# Altium PCB SM3320-BATT-EV.PcbDoc (part 2 of 2)
Units mm, origin at the board's own origin, x right, y up, seen from the top; angles counter-clockwise.
Board outline 119 x 66.5 mm, 2 copper layers (Top Layer, Bottom Layer), stack 1.662 mm thick; 115 components, 48 nets, 280 pads, 270 vias.
Unrouted connection lines stored in the file: 11.
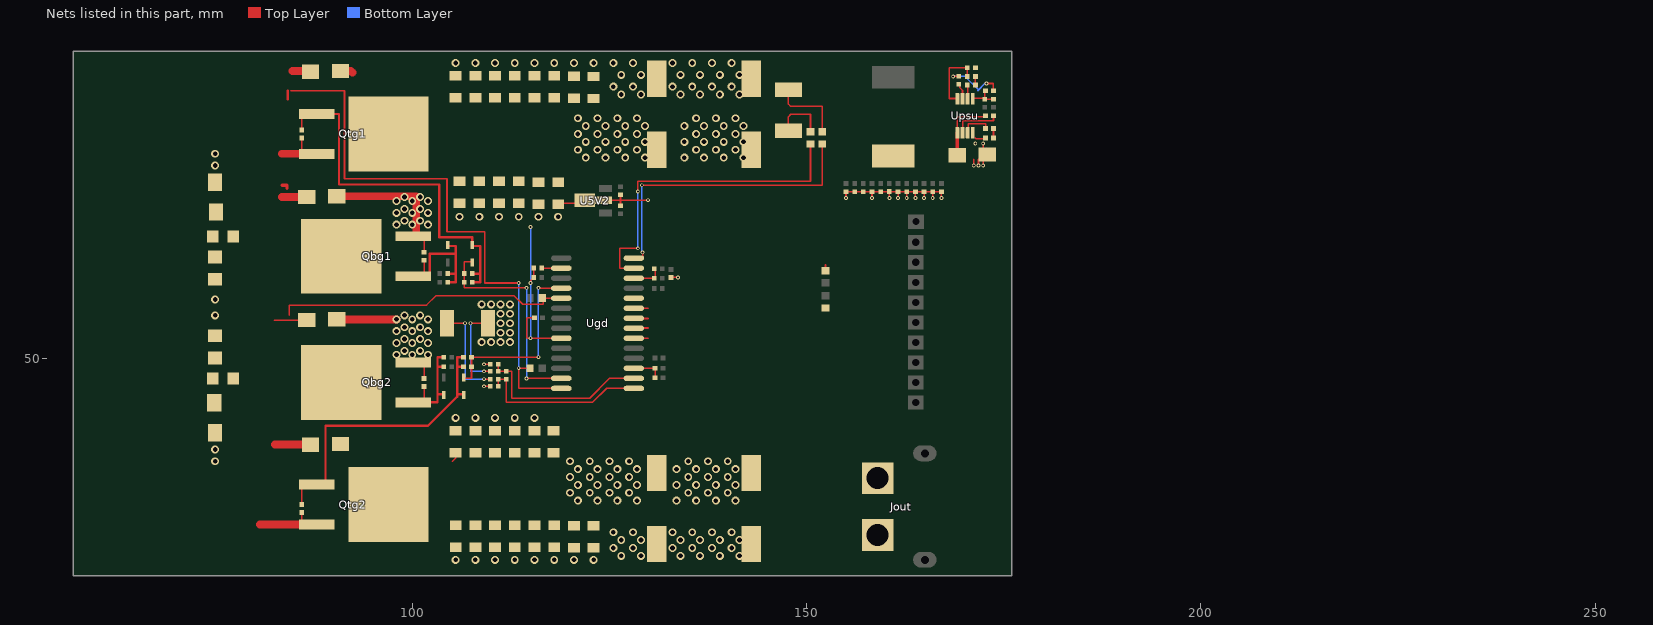
[diagram p2: the nets of this part, all layers, seen from the top]

## Via types
v1: diameter 1, hole 0.6, Top Layer to Bottom Layer, tented both sides, 220 vias
v2: diameter 0.48, hole 0.254, Top Layer to Bottom Layer, tented both sides, 50 vias

## Nets (pads, with @x,y where several pads share a name; then routed paths per layer and width w, separated by ;. In a path a pad name is that pad's centre, name@x,y a point inside that pad or via, vN(x,y) a via of type N, cw(c..) or ccw(c..) an arc to the next point about the centre after c; other vN are vias at no path point) (continued)
GND: C1.1 C4.1 C5.1 C5v1.1 C5v2.1 C6.1 C7.1 C8.1 C9.1 C10.1 C11.1 C12.1 C12v1.2 C12v2.2 C12v3.2 C12v4.2 C12v5.2 C12v6.2 C12v7.2 C12v8.2 C12v9.2 C12v10.2 C12v11.2 C12v12.2 C14.2 C15.2 C16.1 C20.1 C25.1 C27.1 C28.1 C30.1 C36.1 C41.1 C44.1 C45.1 C53.1 C54.1 C55.1 C58.1 C61.1 C70.1 C72.1 C130.1 C201.2 C410.1 C450.1 C470.1 C620.1 Cvcc.1 Cvdd.1 D14.1 D15.1 Dpsu1.2 Jout.MINUS R110.1 R140.1 Ragnd.1 Rcl2.1 Rcs.2 Rcsg.2 Rovs.2 Rpsufb2.1 Rvinb.1 U5V2.2 Ugd.23 Upsu.4 | length 82.3
  Top Layer w0.2: v2(107.4,54.5) 109.4,54.5 Rcs.2@109.4,54.4 ; v2(109.1,46.5) C15.2@109.892,46.5 ; v2(109.1,49.3) C14.2@109.892,49.3 ; C9.1@113.9,69.3 C9.1@114,69.4 ; v2(115,59.6) 115,59.9 Cvdd.1@115.4,60.3 ; Cvcc.1@115.292,55.2 114.5,55.2 114.5,52.6 v2(115,52.6) Ugd.23@118.6,52.6 ; Rovs.2@115.392,61.5 115.392,60.5 Cvdd.1@115.4,60.5 ; C30.1@116.4,69.3 C30.1@116.5,69.4 ; C58.1@118.5,69.605 118.5,69.7 U5V2.2@122.4,69.7 ; U5V2.2@124.7,69.9 124.9,70.1 126.4,70.1 ; C5v2.1@126.4,69.4 C5v2.1@126.4,69.408 126.4,70.1 ; C5v1.1@126.4,70.692 126.4,70.1 ; v2(129.9,70.1) 126.4,70.1 ; Ragnd.1@132.8,60.192 Ragnd.1@132.9,60.292 ; Ragnd.1@132.8,60.308 v2(133.7,60.3) ; v2(155,70.4) C12v1.2@155,71.192 C12v1.2@155,71.2 ; C12v1.2@155,71.292 C12v1.2@155,71.2 ; C12v1.2@155.008,71.192 C12v1.2@155,71.2 ; C12v1.2@155.2,71.2 155.2,71.192 C12v3.2@157,71.192 ; C12v2.2@156.1,71.192 C12v2.2@156.1,71.292 ; C12v3.2@157.2,71.292 C12v3.2@157.2,71.192 C12v4.2@158.2,71.192 ; v2(158.3,70.4) C12v4.2@158.3,71.192 C12v5.2@159.3,71.192 ; C12v5.2@159.4,71.192 C12v6.2@160.5,71.192 ; v2(160.5,70.4) C12v6.2@160.5,71.192 ; C12v6.2@160.5,71.2 C12v6.2@160.5,71.192 ; C12v7.2@161.4,71.192 C12v6.2@160.5,71.192 ; v2(161.6,70.4) C12v7.2@161.6,71.192 ; C12v7.2@161.6,71.2 C12v7.2@161.6,71.192 ; C12v8.2@162.6,71.192 C12v7.2@161.6,71.192 ; v2(162.7,70.4) C12v8.2@162.7,71.192 C12v8.2@162.7,71.199 ; C12v9.2@163.7,71.194 C12v8.2@162.758,71.199 ; C12v9.2@163.7,71.2 C12v8.2@162.5,71.2 ; v2(163.8,70.4) C12v9.2@163.8,71.199 ; C12v9.2@163.8,71.192 C12v10.2@164.9,71.192 ; v2(164.9,70.4) C12v10.2@164.9,71.192 ; v2(166,70.4) C12v11.2@166,71.192 ; C12v11.2@166,71.2 C12v11.2@166,71.192 ; v2(167.1,70.4) C12v12.2@167.1,71.192 ; C12v12.2@167.1,71.2 C12v12.2@167.1,71.192 ; C12v12.2@167.3,71.2 167.292,71.192 C12v12.2@167.1,71.192 ; v2(168.6,85.8) 169.292,85.8 C201.2@169.3,85.808 ; v2(171.2,74.5) 171.2,75.292 ; 171.4,78 171.508,77.892 172.392,77.892 Rcl2.1@172.4,77.9 ; v2(171.8,74.5) Dpsu1.2@171.8,75.292 ; v2(172.4,74.5) Dpsu1.2@172.4,75.292 ; Dpsu1.2@172.4,76.508 v2(172.4,77.3) ; Dpsu1.2@172.8,75.9 Dpsu1.2@172.8,76.7 ; v2(172.8,84.9) 173.693,84.9 173.693,84.6 Rpsufb2.1@173.699,84.008 ; Rpsufb2.1@173.5,83.9 Rpsufb2.1@173.608,83.901 ; C12v8.2@162.5,71.2 C12v8.2@162.7,71.199 ; C12v8.2@162.5,71.2 C12v8.2@162.7,71.199 ; C12v8.2@162.7,71.199 C12v8.2@162.758,71.199 ; C12v8.2@162.7,71.199 C12v8.2@162.758,71.199 ; C12v8.2@162.758,71.199 C12v9.2@163.8,71.199 ; C12v9.2@163.8,71.199 164.9,71.2 C12v10.2@164.9,71.192 ; C12v10.2@164.9,71.192 C12v11.2@166,71.192 ; C12v11.2@166,71.192 C12v12.2@167.1,71.192
  Bottom Layer w0.2: v2(107.4,54.5) 107.4,48.4 109.1,48.4 ; v2(115,52.6) v2(115,59.6) v2(115,66.7) ; v2(168.6,85.8) 170.1,85.8 171.7,84.2 ; 171.7,84 172.6,84.9 v2(172.8,84.9)
  other v1: 105.5,24.5 108,24.5 110.5,24.5 113,24.5 115.5,24.5 118,24.5 120.5,24.5 123,24.5 126.5,25 129,25 134,25 136.5,25 139,25 141.5,25 125.5,26 128,26 133,26 135.5,26 138,26 140.5,26 126.5,27 129,27 134,27 136.5,27 139,27 141.5,27 125.5,28 128,28 133,28 135.5,28 138,28 140.5,28 75,37 75,38.5 105.5,42.5 108,42.5 110.5,42.5 113,42.5 115.5,42.5 108.8,52.1 110,52.1 111.2,52.1 112.4,52.1 111.2,53.3 112.4,53.3 111.2,54.5 112.4,54.5 75,55.5 111.2,55.7 112.4,55.7 108.8,56.9 110,56.9 111.2,56.9 112.4,56.9 75,57.5 106,68 108.5,68 111,68 113.5,68 116,68 118.5,68 75,74.5 75,76 126.5,83.5 129,83.5 134,83.5 136.5,83.5 139,83.5 141.5,83.5 125.5,84.5 128,84.5 133,84.5 135.5,84.5 138,84.5 140.5,84.5 126.5,86 129,86 134,86 136.5,86 139,86 141.5,86 105.5,87.5 108,87.5 110.5,87.5 113,87.5 115.5,87.5 118,87.5 120.5,87.5 123,87.5 125.5,87.5 128,87.5 133,87.5 135.5,87.5 138,87.5 140.5,87.5
  other v2: 171.4,77.3
HIA: Ugd.7 | length 1.5
  Top Layer w0.2: Ugd.7@128.5,53.8 128.5,53.9 129.9,53.9
HIB: Ugd.8 | length 1
  Top Layer w0.2: Ugd.8@128.9,55.1 129.9,55.1
IIN: Ciin.2 Riin.2 Ugd.3 | length 3.5
  Top Layer w0.2: Ugd.3@128.2,48.785 128.2,48.8 Riin.2@130.592,48.8 ; Ciin.2@130.792,47.7 Riin.2@130.792,48.8 Riin.2@130.8,48.8
IOUT: Ciout.2 Riout.2 Ugd.12 | length 3
  Top Layer w0.2: Ugd.12@128.9,60.2 Riout.2@130.592,60.2 ; Riout.2@130.792,60.2 130.792,61.3 130.792,61.5 Ciout.2@130.8,61.5
LIA: Ugd.6 | length 1.8
  Top Layer w0.2: Ugd.6@128.1,52.595 128.1,52.6 129.9,52.6
LIB: Ugd.9 | length 1.2
  Top Layer w0.2: Ugd.9@128.8,56.3 128.8,56.4 129.9,56.4
NetC18_1: C18.1 D15.2 R110.2
NetC19_1: C19.1 D14.2 R140.2
NetC201_1: C201.1 Upsu.7 | length 1.9
  Top Layer w0.2: C201.1@169.5,84.9 169.4,84.8 169.45,84.35 169.775,84.025 Upsu.7@169.775,83.15
NetCbst_1: Cbst.1 Upsu.2 | length 5.7
  Top Layer w0.2: Upsu.2@169.8,79.3 169.8,80.2 173,80.2 ; 173.408,80.2 173,80.2 ; Cbst.1@173.6,80.7 173.7,80.6 173.7,80.2 173.508,80.2 173,80.2
NetCbst_2: Cbst.2 Dpsu1.1 L200.1 Upsu.1 | length 7.5
  Top Layer w0.2: Upsu.1@169.1,78.65 Upsu.1@169.125,78.65 ; Upsu.1@169.1,79.1 169.1,80.7 172.392,80.7
  Top Layer w0.4: Dpsu1.1@169.1,76.1 Upsu.1@169.1,78.65
NetCcmp_1: Ccmp.1 Rpsufb1.2 Rpsufb2.2 Upsu.5 | length 3.6
  Top Layer w0.2: Upsu.5@171.108,83.008 Rpsufb1.2@172.6,83.008 ; Rpsufb1.2@172.6,82.908 Rpsufb2.2@172.6,84 ; Rpsufb1.2@172.7,82.9 172.708,82.908 Ccmp.1@173.7,82.908
NetD3_2: D3.2 Qtg1.1 Rtg1a.2 Rtg1b.2 Rtg1s.2 | length 50.9
  Top Layer w0.2: Rtg1s.2@86,79.008 86,81 Qtg1.1@86.1,81
  Top Layer w0.3: Qtg1.1@87.856,81.04 90.7,81.04 90.7,72.1 103.4,72.1 103.4,65.4 107.6,65.4 D3.2@107.6,64.3 ; D3.2@107.6,64.4 D3.2@107.6,64.3 ; Rtg1a.2@107.608,59.7 108.6,59.7 ; Rtg1b.2@107.608,60.8 108.6,60.8 ; D3.2@107.6,64.3 108.6,64.3 ; 108.6,59.7 108.6,60.8 ; 108.6,59.7 108.6,60.8 ; 108.6,60.8 108.6,64.3 ; 108.6,60.8 108.6,64.3
NetD4_2: D4.2 Qtg2.1 Rtg2a.1 Rtg2b.1 Rtg2s.1 | length 35.6
  Top Layer w0.2: Rtg2s.1@86,31.508 Qtg2.1@86,33.5 ; Qtg2.1@88.5,33.7 Qtg2.1@88.6,33.7
  Top Layer w0.3: Qtg2.1@89,33.7 89,41.5 102,41.5 105.7,45.2 105.7,45.5 ; Rtg2b.1@106.492,49 105.7,49 ; Rtg2a.1@106.492,50.2 105.7,50.2 105.7,49 ; D4.2@106.5,45.7 106.3,45.5 105.7,45.5 ; 105.7,45.5 105.7,49
NetD5_2: D5.2 Qbg1.1 Rbg1a.2 Rbg1b.2 Rbg1s.2 | length 17.3
  Top Layer w0.2: Qbg1.1@101.5,61 Rbg1s.2@101.5,62.492
  Top Layer w0.3: Qbg1.1@100.144,60.46 Qbg1.1@102,60.46 ; Qbg1.1@102,60.2 102,60.4 Qbg1.1@102,60.46 ; Qbg1.1@102,60.5 Qbg1.1@102,60.46 ; Qbg1.1@102.2,60.46 102.2,63.3 105.5,63.3 ; D5.2@104.5,64.3 105.5,64.3 105.5,63.3 ; Rbg1b.2@104.508,60.8 105.5,60.8 ; Rbg1a.2@104.608,59.7 105.5,59.7 105.5,60.8 ; 105.5,60.8 105.5,63.3
NetD6_2: D6.2 Qbg2.1 Rbg2a.1 Rbg2b.1 Rbg2s.1 | length 15.4
  Top Layer w0.2: Qbg2.1@101.5,45 Rbg2s.1@101.5,46.492
  Top Layer w0.3: Qbg2.1@102,44.5 103.2,44.5 103.2,45.5 ; Rbg2a.1@103.9,50.2 103.2,50.2 ; Rbg2b.1@103.984,49 103.2,49 ; D6.2@104,45.5 103.5,45.5 103.2,45.5 ; 103.2,45.5 103.2,49 ; 103.2,45.5 103.2,49 ; 103.2,49 103.2,50.2 ; 103.2,49 103.2,50.2
NetRcl1_1: Rcl1.1 Rcl2.2 | length 1.2
  Top Layer w0.2: Rcl2.2@173.708,78 Rcl1.1@173.708,79.2
NetRcl1_2: Rcl1.2 Upsu.3 | length 3.7
  Top Layer w0.2: Upsu.3@170.5,79 170.5,79.8 172.7,79.8 172.7,79.4 Rcl1.2@172.5,79.2
NetRon_1: Ron.1 Ron_c.2 | length 1.3
  Top Layer w0.2: Ron_c.2@171.308,85.8 Ron_c.2@171.408,85.8 ; Ron.1@171.4,84.8 Ron.1@171.408,84.792 ; Ron.1@171.4,84.808 Ron_c.2@171.4,85.9 ; Ron.1@171.408,84.8 Ron.1@171.508,84.9
NetRon_2: Ron.2 Upsu.6 | length 1.9
  Top Layer w0.2: Ron.2@170.225,84.625 Ron.2@170.4,84.8 ; Upsu.6@170.425,83.05 Ron.2@170.425,84.725
NetRon_c_1: Ron_c.1 Rpsu1.1 Upsu.8 | length 8.6
  Top Layer w0.2: Upsu.8@169.1,83 168.1,83 168.1,86.9 Rpsu1.1@170.392,86.9 170.397,86.9 170.4,86.9 Rpsu1.1@170.4,86.8 ; Ron_c.1@170.384,85.6 170.386,85.8 Rpsu1.1@170.397,86.899
nRST: Ugd.10
OVS: Rovs.1 Ugd.16 | length 2.2
  Top Layer w0.2: Rovs.1@116.208,61.5 Ugd.16@118.3,61.5 ; Rovs.1@116.408,61.5 Rovs.1@116.408,61.6
PGND: Dbg1.2 Dbg2.2 Qbg1.3 Qbg2.3 Rbg1s.1 Rbg2s.2 Rcs.1 Rcsp.2 | length 38.4
  Top Layer w0.2: Qbg2.3@101.4,49.4 Qbg2.3@101.4,49.508 ; Rbg2s.2@101.5,47.508 Qbg2.3@101.5,49.5 ; Rbg1s.1@101.5,63.508 Qbg1.3@101.5,65 ; Rcs.1@104.5,54.5 v2(106.7,54.5) ; Rcs.1@104.5,55.5 Rcs.1@104.5,55.6 ; v2(109.1,48.4) 109.9,48.4 ; v2@109.2,47.4 Rcsp.2@110,47.4
  Top Layer w1: Dbg2.2@90.4,55 v1(98,55) ; 91.5,70.6 100.5,70.6 ; Qbg1.3@100.5,65.5 v1@100.5,70
  Bottom Layer w0.2: v2(106.7,54.5) 106.7,47.4 108.7,47.4 v2@108.9,47.4 ; 108.6,48.4 v2(109.1,48.4)
  other v1: 98,50.5 100,50.5 102,50.5 99,51 101,51 98,52 100,52 102,52 99,52.5 101,52.5 98,53.5 100,53.5 102,53.5 99,54 101,54 100,55 102,55 99,55.5 101,55.5 98,67 100,67 102,67 99,67.5 101,67.5 98,68.5 100,68.5 102,68.5 99,69 101,69 98,70 100,70 102,70 99,70.5 101,70.5
  other v2: 109.1,47.4
SIA: C15.1 CCS.2 Rcsp.1 Ugd.1 | length 21
  Top Layer w0.2: C15.1@110.908,46.5 Rcsp.1@110.908,47.192 ; Rcsp.1@111.1,47.392 CCS.2@111.792,47.392 ; CCS.2@111.9,47.2 111.9,44.5 122.9,44.5 124.645,46.245 Ugd.1@128.1,46.245
SIB: Riinsns1.1 Ugd.14 | length 37.5
  Top Layer w0.2: v2(129.1,72) 152,72 Riinsns1.1@152,77.23 ; Ugd.14@129.2,62.755 v2(129.2,63.5)
  Bottom Layer w0.2: v2(129.1,72) 129.1,63.6 v2(129.2,63.5) v2@129.3,63.5
SOA: C14.1 CCS.1 Rcsg.1 Ugd.2 | length 22.4
  Top Layer w0.2: Rcsg.1@110.892,48.508 C14.1@110.892,49.2 ; Rcsg.1@110.908,48.4 112.6,48.4 112.6,45 122.5,45 125.015,47.515 Ugd.2@128,47.515 ; Ugd.2@128,47.5 Ugd.2@128,47.515 ; Ugd.2@128,47.6 Ugd.2@128,47.515 ; Ugd.2@128.1,47.515 Ugd.2@128,47.515
SOB: Riinsns2.1 Ugd.13 | length 42
  Top Layer w0.2: Ugd.13@128.1,61.485 126.3,61.485 126.3,64 v2(128.6,64) ; v2(128.6,71.2) 128.6,72.5 150.5,72.5 Riinsns2.1@150.5,77.23 ; v2@128.7,64 v2(128.6,64) ; v2@128.7,64.1 v2(128.6,64)
  Bottom Layer w0.2: v2(128.6,71.2) 128.6,64.1 v2@128.7,64
SW1: C18.2 Cboot1.1 Dbg1.1 Dtg1.2 Qbg1.2 Qtg1.3 Rtg1s.1 Ugd.28 | length 87.5
  Top Layer w0.2: 84.6,84 91.4,84 91.4,72.8 104.4,72.8 104.4,66.1 109.2,66.1 109.2,59.6 v2(113.5,59.6) ; Rtg1s.1@86,77.992 86,76 86,75.8 Qtg1.3@86.1,75.8 ; v2@113.4,48.8 v2(113.5,48.8) ; Cboot1.1@115.292,48.8 v2(113.5,48.8) ; Ugd.28@118.7,46.245 113.5,46.245 v2(113.5,48.8)
  Top Layer w0.3: 84.2,82.9 84.2,84
  Top Layer w0.4: 83.5,72 84.1,72 84.1,71.6
  Top Layer w1: 83.5,70.5 Dbg1.1@86.1,70.5 ; 83.5,76 86,76 87.856,76 Qtg1.3@87.856,75.96 ; 84.8,86.5 Dtg1.2@87.2,86.5
  Bottom Layer w0.2: v2(113.5,48.8) v2(113.5,59.6)
SW2: C19.2 Cboot2.1 Dbg2.1 Dtg2.2 Qbg2.2 Qtg2.3 Rtg2s.2 Ugd.19 | length 56
  Top Layer w0.2: 82.5,54.9 Dbg2.1@86.6,54.9 Dbg2.1@86.5,55 ; 84.4,55.5 84.4,56.8 101.8,56.8 103,58 112.9,58 114,56.9 116.6,56.9 Cboot2.1@116.6,58.1 ; Qtg2.3@86,28.5 86,28.96 Rtg2s.2@86,30.492 ; Cboot2.1@116.625,57.675 Ugd.19@118.9,57.675 Ugd.19@119.1,57.675
  Top Layer w1: 80.7,28.96 86,28.96 Qtg2.3@87.856,28.96 ; 82.6,39.1 Dtg2.2@87.1,39.1
TG1: D3.1 Rtg1a.1 Rtg1b.1 Ugd.27 | length 28
  Top Layer w0.2: D3.1@107.6,62.3 106.6,62.3 106.6,59.308 106.6,59 v2(114.5,59) ; v2@114.5,47.6 114.5,47.515 Ugd.27@118.7,47.515
  Bottom Layer w0.2: v2(114.5,47.5) 114.5,47.6 v2(114.5,59)
TG2: D4.1 Rtg2a.2 Rtg2b.2 Ugd.18 | length 24
  Top Layer w0.2: D4.1@106.5,47.5 107.5,47.5 107.508,47.508 Rtg2b.2@107.508,49 Rtg2a.2@107.508,50.092 ; Rtg2a.2@107.4,50.2 Rtg2a.2@107.508,50.092 ; Rtg2a.2@107.5,50.2 Rtg2a.2@107.508,50.2 ; v2@115.9,58.945 Ugd.18@118.7,58.945 ; v2(116,50.2) Rtg2a.2@107.508,50.2 ; Rtg2a.2@107.508,50.092 Rtg2a.2@107.508,50.2
  Bottom Layer w0.2: v2(116,50.2) v2(116,59)
VIN_N: C1.2 C4.2 C5.2 C6.2 C7.2 C8.2 C9.2 C10.2 C11.2 C12.2 C16.2 C20.2 C25.2 C27.2 C28.2 C30.2 C36.2 C41.2 C44.2 C45.2 C53.2 C54.2 C55.2 C58.2 C61.2 C70.2 C72.2 C130.2 C410.2 C450.2 C470.2 C620.2 Dtg1.1 Dtg2.1 Qtg1.2 Qtg2.2 R1.1 Riinsns2.2 | length 10.2
  Top Layer w0.2: 105.1,37 105.5,37.4 C470.2@105.5,38.505 ; R1.1@147.7,78.9 147.7,80.7 148,81 150.5,81 Riinsns2.2@150.5,78.77
  Top Layer w1: Dtg1.1@90.9,86.5 92.2,86.5 92.4,86.3
  other v1: 121,32 123.5,32 126,32 128.5,32 133.5,32 136,32 138.5,32 141,32 120,33 122.5,33 125,33 127.5,33 135,33 137.5,33 140,33 121,34 123.5,34 126,34 128.5,34 133.5,34 136,34 138.5,34 141,34 120,35 122.5,35 125,35 127.5,35 135,35 137.5,35 140,35 121,36 123.5,36 126,36 128.5,36 133.5,36 136,36 138.5,36 141,36 120,37 122.5,37 125,37 127.5,37 135,37 137.5,37 140,37 122,75.5 124.5,75.5 127,75.5 129.5,75.5 134.5,75.5 137,75.5 139.5,75.5 142,75.5 121,76.5 123.5,76.5 126,76.5 128.5,76.5 136,76.5 138.5,76.5 141,76.5 122,77.5 124.5,77.5 127,77.5 129.5,77.5 134.5,77.5 137,77.5 139.5,77.5 142,77.5 121,78.5 123.5,78.5 126,78.5 128.5,78.5 136,78.5 138.5,78.5 141,78.5 122,79.5 124.5,79.5 127,79.5 129.5,79.5 134.5,79.5 137,79.5 139.5,79.5 142,79.5 121,80.5 123.5,80.5 126,80.5 128.5,80.5 136,80.5 138.5,80.5 141,80.5
VIN_P: R1.2 Riinsns1.2 Rpsu1.2 Rvint.2 | length 10.2
  Top Layer w0.2: R1.2@147.7,84.1 147.7,82.3 148,82 152,82 Riinsns1.2@152,79 ; 152.4,61.9 152.4,61.37 Rvint.2@152.6,61.17
  Top Layer w0.4: Rvint.2@152.6,61 Rvint.2@152.6,61.17
VOUT_N: Jout.PLUS
pads on no net: Jout.M Ugd.15
copper on no net: | length 0.4
  Top Layer w0.2: 163.3,62.2 163.5,62
  Bottom Layer w0.2: 163.8,47 163.8,47.1

## Polygon pours and split planes (outlines as drawn)
GND on Bottom Layer "Bottom Layer-GND" (solid, shelved, pour order 1242): 184,71 253,71 253,41 184,41
GND on Bottom Layer "Bottom Layer-GND" (solid, shelved, pour order 1248): 205.5,41.5 234,41.5 234,36.744 205.5,36.744

## Other copper
Top Layer:
  rectangle net VIN_N: 143.5,73.5 149.5,79.5
  rectangle net GND: 105.5,67.5 119,68.5
  region net GND: 116.5,69.9 115.5,69.9 115.5,67.9 116.5,67.9
  rectangle net VIN_N: 115.5,72.4 116.5,74.4
  rectangle net VIN_N: 119.5,31 144.5,38
  rectangle net VIN_N: 91.5,36 102.5,40
  rectangle net GND: 124.5,24 144.5,29
  region net GND: 125.5,25 105,25 105,24 125.5,24
  rectangle net GND: 120,24.5 121,26.2
  rectangle net GND: 122.5,24.5 123.5,26.2
  rectangle net GND: 115,24.5 116,26.2
  rectangle net GND: 117.5,24.5 118.5,26.2
  rectangle net GND: 110,24.5 111,26.2
  rectangle net GND: 112.5,24.5 113.5,26.2
  region net GND: 108.5,26.4 107.5,26.4 107.5,24.4 108.5,24.4
  region net GND: 106,26.4 105,26.4 105,24.4 106,24.4
  rectangle net GND: 105,87 125.5,88
  region net GND: 108.5,87.5 107.5,87.5 107.5,85.8 108.5,85.8
  region net GND: 106,87.5 105,87.5 105,85.8 106,85.8
  region net GND: 113.5,87.5 112.5,87.5 112.5,85.8 113.5,85.8
  region net GND: 111,87.5 110,87.5 110,85.8 111,85.8
  region net GND: 118.5,87.5 117.5,87.5 117.5,85.8 118.5,85.8
  region net GND: 116,87.5 115,87.5 115,85.8 116,85.8
  region net SW1: 85,77 85,88 66,88 66,77
  region net SW2: 85,24 85,36 66,36 66,24
  region net +10V: 167.1,83.2 167.1,86.5 154.5,86.5 154.5,83.2
  rectangle net +10V: 154.7,73.3 157.5,86.5
  region net NetCbst_2: 170.1,74.9 170.1,76.7 158.3,76.7 158.3,74.9
  rectangle net GND: 170.9,75 171.9,79.4
  region net +10V: 167.2,72.8 167.2,74 154.7,74 154.7,72.8
  rectangle net VIN_N: 100,73.5 144.5,82
  rectangle net VIN_N: 122.5,28.4 123.5,30.4
  rectangle net VIN_N: 120,28.4 121,30.4
  rectangle net GND: 124.5,83 144.5,88
  region net VIN_P: 153,83 153,88 145.7,88 145.7,83
  rectangle net VIN_N: 102,32.2 123.5,37
  rectangle net VIN_N: 117.4,36.4 118.4,38.4
  region net VIN_N: 119,74.1 118,74.1 118,72.1 119,72.1
  region net GND: 118.4,43 117.4,43 117.4,40.5 118.4,40.5
  rectangle net GND: 118,67.5 119,70
  rectangle net PGND: 89.3,54.1 102.6,56
  region net VIN_N: 104,84 104,88 92,88 92,84
  rectangle net GND: 108.3,51.5 113,57.5
  rectangle net VIN_N: 94,74 123.8,78.8
  region net GND: 75.5,76 74.5,76 74.5,72 75.5,72
  rectangle net GND: 74.5,37 75.5,41
  rectangle net NetC19_1: 74.5,43.5 75.5,50.5
  rectangle net NetC18_1: 74.5,62.5 75.5,69.5
  rectangle net GND: 74.5,53 75.5,60
  rectangle net PGND: 89.3,69.1 102.5,71.1
  rectangle net PGND: 97.3,64 102.5,71
  rectangle net PGND: 89.3,53.5 102,55.5
  rectangle net PGND: 97.3,48 102.5,55.5
  rectangle net VIN_N: 91.5,24.5 103.5,37
  rectangle net SW2: 77,27 85,57
  region net GND: 114,69.9 113,69.9 113,67.9 114,67.9
  region net GND: 106.5,69.9 105.5,69.9 105.5,67.9 106.5,67.9
  region net GND: 109,69.9 108,69.9 108,67.9 109,67.9
  region net GND: 111.5,69.9 110.5,69.9 110.5,67.9 111.5,67.9
  rectangle net GND: 120,85.6 121,87.6
  rectangle net GND: 122.5,85.6 123.5,87.6
  region net VIN_N: 118.5,83.5 117.5,83.5 117.5,81.5 118.5,81.5
  region net VIN_N: 116,83.5 115,83.5 115,81.5 116,81.5
  region net VIN_N: 113.5,83.5 112.5,83.5 112.5,81.5 113.5,81.5
  region net VIN_N: 123.5,83.1 122.5,83.1 122.5,81.1 123.5,81.1
  region net VIN_N: 121,83.1 120,83.1 120,81.1 121,81.1
  rectangle net VIN_N: 105.5,72.4 106.5,74.4
  rectangle net VIN_N: 108,72.4 109,74.4
  rectangle net VIN_N: 110.5,72.4 111.5,74.4
  rectangle net VIN_N: 113,72.4 114,74.4
  region net VIN_N: 106,83.5 105,83.5 105,81.5 106,81.5
  region net VIN_N: 108.5,83.5 107.5,83.5 107.5,81.5 108.5,81.5
  region net VIN_N: 111,83.5 110,83.5 110,81.5 111,81.5
  rectangle net GND: 115,40.7 116,42.7
  rectangle net GND: 112.5,40.7 113.5,42.7
  rectangle net GND: 110,40.7 111,42.7
  rectangle net GND: 107.5,40.7 108.5,42.7
  rectangle net GND: 105,40.7 106,42.7
  region net VIN_N: 113.5,30.6 112.5,30.6 112.5,28.6 113.5,28.6
  region net VIN_N: 111,30.6 110,30.6 110,28.6 111,28.6
  region net VIN_N: 108.5,30.6 107.5,30.6 107.5,28.6 108.5,28.6
  region net VIN_N: 106,30.6 105,30.6 105,28.6 106,28.6
  rectangle net VIN_N: 105,36.4 106,38.4
  rectangle net VIN_N: 107.5,36.4 108.5,38.4
  rectangle net VIN_N: 110,36.4 111,38.4
  rectangle net VIN_N: 112.5,36.4 113.5,38.4
  rectangle net VIN_N: 115,36.4 116,38.4
  region net VIN_N: 118.5,30.6 117.5,30.6 117.5,28.6 118.5,28.6
  region net VIN_N: 116,30.6 115,30.6 115,28.6 116,28.6
  rectangle net GND: 105,41.9 118.4,43.1
  rectangle net VIN_N: 94,30 123.5,36.5
  rectangle net SW1: 77,57.5 85,85
  rectangle net SW1: 77,57.5 96.2,66.7
  rectangle net VIN_N: 91.9,73.3 104,87
  rectangle net SW2: 79.5,42.3 96.2,51.8
  region: 117.8,46.4
  region net PGND: 101.1,55.3 103,57.2 104.6,57.2 104.6,53.8 103,52.2 101.1,52.2
  pour cut-out: 108.7,46.9 108.7,48.8 110.4,48.8 110.4,46.9
Bottom Layer:
  rectangle net GND: 112,60.5 116.5,83
  rectangle net GND: 105.5,27.5 117,47
  rectangle net GND: 110,42 113,50
  rectangle net GND: 105.5,55.5 113,83
  rectangle net GND: 111,58.5 113,74
  rectangle net VIN_N: 118,73 144.5,81
  rectangle net VIN_N: 118,31 144.5,37.5
  rectangle net VIN_N: 118,32 127.5,61
  rectangle net VIN_N: 118,60 127.5,80
  region net GND: 106,41 106,75 104,75 104,41
  region net GND: 113,49 113,59 108,59 108,49
  rectangle net GND: 90,28 106,48.5
  region net GND: 96,88 66,88 66,27 96,27
  rectangle net GND: 89,27 103,47
  rectangle net GND: 159.5,69 173,86.5
  rectangle net GND: 66,24 144.5,30
  region net GND: 106,88 90,88 90,72.5 106,72.5
  region net PGND: 103,50 103,71.5 97,71.5 97,50
  region net GND: 144.5,82 144.5,88 104,88 104,82
  pour cut-out: 106.5,49 109.5,49 109.5,47 106.5,47
  pour cut-out: 106.25,47 106.25,55 107.75,55 107.75,47

## Silkscreen, mask and mechanical layers (free items; w line width, h text height)
Top Overlay:
  text "SOL_POL" at 165.8,67 h0.8
  text "GND" at 165.8,64.4 h0.8
  text "SDA_3V3" at 165.8,61.8 h0.8
  text "SCL_3V3" at 165.8,59.3 h0.8
  text "+3V3" at 165.8,56.8 h0.8
  text "BST_SIM" at 165.8,54.2 h0.8
  text "SDA_3V3" at 165.8,51.7 h0.8
  text "SCL_3V3" at 165.8,49.2 h0.8
  text "+5V" at 165.8,46.7 h0.8
  text "nRST" at 165.8,44 h0.8
  text "DC-" at 162.5,36 h2 r180
  text "DC+" at 162.5,30 h2 r180
Mechanical 9:
  drawing of 61 lines, arcs and shapes, not listed
  text "1" at 21.37,152.273 h1.12
  text "2" at 84.76,152.273 h1.12
  text "3" at 147.989,152.273 h1.12
  text "4" at 211.658,152.273 h1.12
  text "5" at 275.133,152.273 h1.12
  text "6" at 338.76,152.273 h1.12
  text "A" at -8.001,123.241 h1.12
  text "A" at 367.919,123.241 h1.12
  text "B" at 367.919,62.789 h1.12
  text "C" at 367.919,2.464 h1.12
  text "PROJECT TITLE:" at 290.703,-52.451 h1.12
  text ".PRJ_Title" at 291.973,-55.499 h1.12
  text "D" at -8.001,-57.734 h1.12
  text "D" at 367.919,-57.734 h1.12
  text "REV:" at 252.857,-59.817 h1.12
  text "PRINT DATE:" at 274.142,-59.817 h1.12
  text "DESIGNED FOR:" at 290.703,-59.817 h1.12
  text ".PCB_MinorRev" at 253.492,-63.754 h1.12
  text ".Print_Date" at 274.193,-63.754 h1.12
  text ".PRJ_Customer" at 291.973,-63.754 h1.12
  text "PADC NUMBER:" at 290.703,-67.691 h1.12
  text "FAB DRAWING NUMBER:" at 329.946,-67.691 h1.12
  text "National Semiconductor and/or its licensors do not warrant the accuracy or completeness of this" at 132.461,-67.742 h1.12
  text "specification or any information contained therein. National and/or its licensors do not warrant that" at 132.461,-70.094 h1.12
  text ".print_Scale" at 253.492,-70.485 h1.12
  text ".PRJ_PADC" at 291.973,-71.247 h1.12
  text "551" at 331.216,-71.247 h1.12
  text ".PRJ_BasePN" at 336.169,-71.247 h1.12
  text "this design will meet the specifications, will be suitable for your application or fit for any particular" at 132.461,-72.446 h1.12
  text "purpose, or will operate in an implementation. National and/or its licensors do not warrant that the" at 132.461,-74.798 h1.12
  text "FILE NAME:" at 252.857,-75.311 h1.12
  text "ALTIUM DESIGNER VERSION:" at 329.946,-75.311 h1.12
  text "design is production worthy. You should completely validate and test your design implementation" at 132.461,-77.15 h1.12
  text ".Pcb_File_Name_No_Path" at 253.492,-78.698 h1.12
  text ".Application_BuildNumber" at 331.216,-79.29 h1.12
  text "to confirm the system functionality for your application." at 132.461,-79.502 h1.12
  text "1" at 21.37,-83.947 h1.12
  text "2" at 84.76,-83.947 h1.12
  text "3" at 147.989,-83.947 h1.12
  text "4" at 211.658,-83.947 h1.12
  text "5" at 275.133,-83.947 h1.12
  text "6" at 338.76,-83.947 h1.12
Mechanical 10:
  drawing of 203 lines, arcs and shapes, not listed
  text "Update the notes below per your unique requirements." at 476.555,121.615 h1.12
  text "In most cases, you should be able to delete or modify lines." at 476.301,117.043 h1.12
  text "NOTES:  UNLESS OTHERWISE SPECIFIED" at 476.682,109.296 h1.12
  text "1. MATERIAL: PER IPC-4101/24" at 476.682,106.102 h1.12
  text "1A. LAMINATE: TYPE GFN, GRADE A, CLASS 2, AND TYPE FR-4" at 476.682,103.501 h1.12
  text "DESIGN INFORMATION" at 317.373,100.863 h1.52
  text "1A. LAMINATE: HIGH-TEMPERATURE FR4" at 478.333,99.715 h1.12
  text "1B. COPPER LAYERS: .0028 +/-.0005 INCH OUTER.   .0028 +/-.0005 INCH INNER LAYERS." at 478.46,97.114 h1.12
  text "(REFER ALSO ARRAY/PANEL PROFILING INFORMATION)" at 308.19,96.756 h1.52
  text "BOARD SIZE" at 290.765,96.647 h1.52
  text "3450MIL" at 302.508,93.4 h1.52
  text "X" at 315.353,93.4 h1.52
  text "5000MIL" at 321.228,93.4 h1.52
  text "1C. ALL COPPER LAYERS MUST BE SPACED PER DETAIL \"A\"." at 478.46,93.328 h1.12
  text "1D. BOARD THICKNESS IS MEASURED INCLUDING TOP AND BOTTOM SIDES FINISHED COPPER. ANY TIN," at 478.587,90.727 h1.12
  text "Number of Layers :" at 301.002,88.392 h1.52
  text "6" at 328.81,88.138 h1.52
  text "TIN/LEAD OR GOLD PLATING, SOLDERMASK AND SILKSCREEN LEGEND MUST NOT BE INCLUDED IN" at 484.556,87.533 h1.12
  text "MIN. TRACK WIDTH:" at 301.002,84.861 h1.52
  text "8" at 328.846,84.861 h1.52
  text "MIL" at 332.777,84.861 h1.52
  text "FINISHED BOARD THICKNESS." at 486.588,83.747 h1.12
  text "MIN. CLEARANCE:" at 301.002,81.509 h1.52
  text "8" at 328.846,81.509 h1.52
  text "MIL" at 332.777,81.509 h1.52
  text "1E. ALL INNER LAYERS MUST BE OXIDE COATED." at 480.619,80.553 h1.12
  text "MIN. VIA PAD SIZE:" at 301.002,78.156 h1.52
  text "24" at 328.084,78.156 h1.52
  text "MIL" at 332.777,78.156 h1.52
  text "2. ALL CONDUCTOR LAYERS MUST BE REGISTERED WITHIN +/- .005 INCH FROM TRUE POSITION." at 476.682,77.359 h1.12
  text "0.05mm (2MIL)" at 318.655,74.556 h1.52
  text "MINIMUM ANNULAR RING" at 292.639,74.448 h1.52
  text "EXTERNAL" at 336.638,74.448 h1.52
  text "3. ETCH TOLERANCES:" at 476.682,74.166 h1.12
  text "PER" at 297.719,71.45 h1.52
  text "IPC-D-275 CLASS 2 LEVEL C" at 303.307,71.45 h1.52
  text "3A. ALL EXTERNAL LAYERS CONDUCTOR WIDTH MUST BE WITHIN +/- .0015 INCH OR +/- 15% OF" at 480.619,70.972 h1.12
  text "MIL, HOLES" at 341.108,68.598 h1.52
  text "+/-" at 331.14,68.58 h1.52
  text "+/-" at 352.831,68.58 h1.52
  text "REGISTRATION TOLERANCES:" at 292.639,68.453 h1.52
  text "METAL" at 323.113,68.453 h1.52
  text "5" at 337.749,68.453 h1.52
  text "3" at 358.907,68.453 h1.52
  text "MIL" at 361.86,68.453 h1.52
  text "GERBER DATA, WHICHEVER IS SMALLER." at 487.604,68.371 h1.12
  text "3B. ALL INTERNAL LAYERS CONDUCTOR WIDTH MUST BE WITHIN +/- .0010 INCH OR +/- 15%" at 480.492,64.585 h1.12
  text "MATERIAL:" at 290.74,63.133 h1.52
  text "OF GERBER DATA, WHICHEVER IS SMALLER." at 488.493,61.983 h1.12
  text "FR-4 High Tg" at 315.796,59.568 h1.52
  text "FR-4" at 302.45,59.351 h1.52
  text "X" at 311.898,59.351 h1.52
  text "OTHER" at 339.229,59.351 h1.52
  text "3C. CRITICAL DIMENSIONS FOR THIS DESIGN ARE xxxxxxxxxxxxxxxxxxx" at 480.492,58.197 h1.12
  text "62 MIL (1.6mm) +/-10%" at 309.564,55.218 h1.52
  text "THICKNESS:" at 292.639,55.109 h1.52
  text "X" at 306.309,55.109 h1.52
  text "OTHER" at 342.2,55.109 h1.52
  text "4. DRILL TOLERANCES AND HOLE SIZES ARE FOR FINISHED BOARD:" at 476.682,55.004 h1.12
  text "ALL .004 INCH MICROVIA HOLES ARE +0.001/-0.004 INCH." at 484.429,51.81 h1.12
  text "TOLERANCE:" at 292.639,51.096 h1.52
  text "X" at 313.958,51.096 h1.52
  text "ANSI IPC-6012 TYPE 3 CLASS 2" at 318.706,51.096 h1.52
  text "ALL PLATED THROUGH HOLES TO .080 INCH ARE +/- .003 INCH." at 484.302,48.616 h1.12
  text "OTHER +/-" at 318.705,47.133 h1.52
  text "ALL PLATED THROUGH HOLES OVER .081 INCH ARE +/- .005 INCH." at 484.302,45.423 h1.12
  text "BOW & TWIST:" at 292.639,43.145 h1.52
  text "X" at 313.958,43.145 h1.52
  text "ANSI IPC-6012 TYPE 3 CLASS 2" at 318.706,43.145 h1.52
  text "ALL NON-PLATED THROUGH HOLES ARE +/- .005 INCH." at 484.302,42.229 h1.12
  text "OTHER +/-" at 318.705,39.119 h1.52
  text "5.  ALL HOLES MUST BE REGISTERED WITHIN +/-.003 INCH FROM TRUE POSITION." at 476.682,39.035 h1.12
  text "6.  MINIMUM ANNULAR RING MUST BE .002 INCH." at 476.682,35.842 h1.12
  text "COPPER THICKNESS (FINISHED):" at 290.74,35.678 h1.52
  text "7. PLATING:" at 476.682,32.648 h1.12
  text "1.4MIL (1oz)" at 313.092,31.799 h1.52
  text "2MIL (1.4oz)" at 332.574,31.799 h1.52
  text "2.8MIL (2oz)" at 351.04,31.799 h1.52
  text "OUTER:" at 299.808,31.69 h1.52
  text "X" at 347.98,31.471 h1.52
  text "7A. PER MIL-C-14550, PLATED THROUGH HOLES MUST BE PLATED WITH .0008 MIN. TO" at 480.492,30.047 h1.12
  text "X" at 340.385,27.864 h1.52
  text "1.4MIL (1oz)" at 321.982,27.811 h1.52
  text "2.8MIL (2oz)" at 343.42,27.811 h1.52
  text "INNER SIGNAL:" at 299.808,27.702 h1.52
  text ".0015 INCH MAX. THICK COPPER." at 488.62,26.261 h1.12
  text "DRILLING:" at 290.74,24.172 h1.52
  text "7B. FINISH: IMMERSION GOLD: 2 TO 8 MICROINCHES GOLD OVER 120-240 MICROINCHES" at 480.492,23.067 h1.12
  text "REFERENCE:" at 292.639,21.2 h1.52
  text "X" at 309.104,21.2 h1.52
  text "AS SHOWN" at 313.854,21.2 h1.52
  text "X" at 331.99,21.2 h1.52
  text "NC_DRILL FILES" at 335.469,21.2 h1.52
  text "OF ELECTROLESS NICKEL." at 488.62,19.873 h1.12
  text "PTH MIN COPPER THICKNESS:" at 292.639,17.187 h1.52
  text "X" at 326.935,17.187 h1.52
  text "1MIL" at 330.415,17.187 h1.52
  text "OTHER" at 343.039,17.187 h1.52
  text "8. WARP AND TWIST OF FINISHED BOARDS MUST NOT EXCEED .007 INCH PER INCH." at 476.682,16.68 h1.12
  text "9. SOLDERMASK: PER IPC-SM-840" at 476.682,13.486 h1.12
  text "BOARD FINISH:" at 290.74,13.148 h1.52
  text "9A. SOLDERMASK BOTH TOP AND BOTTOM SIDES." at 480.111,10.292 h1.12
  text "SILKSCREEN:" at 294.683,10.151 h1.52
  text "X" at 318.782,10.151 h1.52
  text "TOP" at 321.982,10.151 h1.52
  text "X" at 331.736,10.151 h1.52
  text "BOTTOM" at 334.961,10.151 h1.52
  text "9B. SOLDERMASK MUST CLEAR ALL LANDS SHOWN ON GERBER SOLDERMASK LAYERS." at 479.984,7.099 h1.12
  text "SILKSCREEN COLOR:" at 294.683,5.909 h1.52
  text "X" at 318.755,5.909 h1.52
  text "WHITE" at 321.982,5.909 h1.52
  text "OTHER" at 334.961,5.909 h1.52
  text "9C. COLOR GREEN AND SOLVENT FREE." at 479.984,3.905 h1.12
  text "SOLDER RESIST COLOR:" at 294.683,1.591 h1.52
  text "9D. LIQUID PHOTO-IMAGEABLE MUST BE .0002 MIN. TO .0008 MAX. INCH THICK MEASURED OVER COPPER PLATING." at 479.984,0.711 h1.12
  text "10. SILKSCREEN TOP AND BOTTOM SIDES USING A GLOSSY WHITE, NONCONDUCTIVE, EPOXY BASED INK." at 476.682,-1.89 h1.12
  text "X" at 309.103,-2.453 h1.52
  text "GREEN" at 312.33,-2.453 h1.52
  text "BLUE" at 327.341,-2.453 h1.52
  text "OTHER" at 341.007,-2.453 h1.52
  text "NO SILKSCREEN ALLOWED ON GOLD AREAS, ON PADS OR IN HOLES." at 484.556,-5.084 h1.12
  text "IMMERSION GOLD (ENIG)" at 317.689,-7.241 h1.52
  text "SURFACE FINISH:" at 290.74,-7.35 h1.52
  text "X" at 312.941,-7.35 h1.52
  text "Pb-FREE HASL" at 348.99,-7.35 h1.52
  text "11. ROUTE BOARD OUTLINE, PER DRAWING DIMENSIONS." at 476.682,-8.277 h1.12
  text "OTHER" at 317.689,-11.338 h1.52
  text "12. VENDOR MUST ENTER VENDOR'S IDENTITY, DATE CODE AND ANY OTHER IDENTIFICATION MARKS ON" at 476.682,-11.471 h1.12
  text "BOTTOM SIDE ETCH (APPROXIMATELY WHERE SHOWN, IF SHOWN)" at 484.429,-14.665 h1.12
  text "ARRAY/PANEL:" at 290.74,-15.884 h1.52
  text "CUT AND TRIM PER MECH LAYER 1" at 317.689,-15.993 h1.52
  text "13. OTHER VENDOR NOMENCLATURE OR MARKINGS SHOULD NOT BE ETCHED OR" at 476.682,-18.451 h1.12
  text "N.C. ROUTE" at 317.689,-19.847 h1.52
  text "X" at 334.936,-19.847 h1.52
  text "V. SCORE" at 339.686,-19.847 h1.52
  text "SILKSCREENED ON BOARD WITHOUT PRIOR PERMISSION." at 484.429,-21.645 h1.12
  text "CERTIFICATION:" at 290.74,-23.326 h1.52
  text "MATERIALS AND WORKMANSHIP FOR ALL PCBS" at 309.155,-23.326 h1.52
  text "14. ALL VENDOR IN-PROCESS MARKINGS, QA STAMPS, ETC. MUST BE PLACED ON THE BOTTOM SIDE OF BOARD." at 476.682,-24.246 h1.12
  text "TO MEET OR EXCEED THE REQUIREMENTS OF:" at 309.155,-25.816 h1.52
  text "15. FINISHED BOARD MUST MEET UL94V-0 RATING AND RoHS COMPLIANCE." at 476.682,-28.032 h1.12
  text "X" at 299.668,-29.283 h1.52
  text "ANSI IPC-A-600F CLASS ->" at 303.199,-29.283 h1.52
  text "X" at 344.831,-29.283 h1.52
  text "2" at 347.852,-29.283 h1.52
  text "1" at 339.851,-29.321 h1.52
  text "3" at 356.844,-29.321 h1.52
  text "16. DOCUMENTATION THAT MUST BE DELIVERED WITH BOARDS:" at 476.682,-31.226 h1.12
  text "X" at 299.72,-33.334 h1.52
  text "UL 94V-0" at 303.199,-33.334 h1.52
  text "X" at 320.345,-33.334 h1.52
  text "RoHS" at 323.824,-33.334 h1.52
  text "OTHER" at 340.191,-33.334 h1.52
  text "PER ORDER" at 350.277,-33.334 h1.52
  text "16A. CROSS SECTION REPORT (SPACING BETWEEN COPPER LAYERS AND COPPER THICKNESS)" at 479.857,-34.419 h1.12
  text "ADDITIONAL REQUIREMENTS:" at 290.74,-36.915 h1.52
  text "16B. ELECTRICAL TEST CERTIFICATION OF COMPLIANCE (ACCORDANCE WITH IPC-ET-652 CLASS II)" at 479.603,-37.613 h1.12
  text "MICROSECTION:" at 292.639,-39.836 h1.52
  text "YES" at 315.645,-39.836 h1.52
  text "16C. RoHS CERTIFICATE OF COMPLIANCE." at 479.476,-40.807 h1.12
  text "REQUIRED" at 337.527,-43.802 h1.52
  text "BARE BOARD ELEC. TEST:" at 292.639,-43.875 h1.52
  text "NONE" at 325.805,-43.875 h1.52
  text "X" at 334.301,-43.875 h1.52
  text "PER ORDER" at 352.564,-43.875 h1.52
  text "16D. MEASUREMENTS OF CRITICAL PAD AND/OR TRACE DIMENSIONS INDICATED ON NOTE 3C" at 479.73,-44 h1.12
  text "16E. IMPEDANCE REPORT (REQUIRED IMPEDANCE TRACES PER NOTE 19)" at 479.73,-47.194 h1.12
  text "MANUFACTURER'S ID/LOGO:" at 292.639,-47.863 h1.52
  text "RAIL" at 329.869,-47.972 h1.52
  text "X" at 339.381,-47.972 h1.52
  text "METAL" at 342.361,-47.972 h1.52
  text "SILK" at 355.358,-47.972 h1.52
  text "17. ALL TOP AND BOTTOM LAYER .0xx TRACES TO BE xx OHM IMPEDANCE." at 476.682,-50.388 h1.12
  text "ALL INTERNAL LAYER .0xx TRACES TO BE xx OHM IMPEDANCE." at 484.937,-53.581 h1.12
  text "TRACE WIDTH AND LAYER SPACING MAY BE CHANGED TO ACCOMMODATE FABRICATION PROCESS BUT" at 484.683,-56.775 h1.12
  text "PRIOR APPROVAL IS REQUIRED BEFORE TRACE WIDTH OR LAYER SPACING CHANGES ARE MADE." at 488.112,-59.969 h1.12